# Altium PCB PCB1.PcbDoc
Units mm, origin at the board's own origin, x right, y up, seen from the top; angles counter-clockwise.
Board outline 90 x 85 mm, 2 copper layers (Top Layer, Bottom Layer); 35 components, 43 nets, 187 pads, 34 vias.
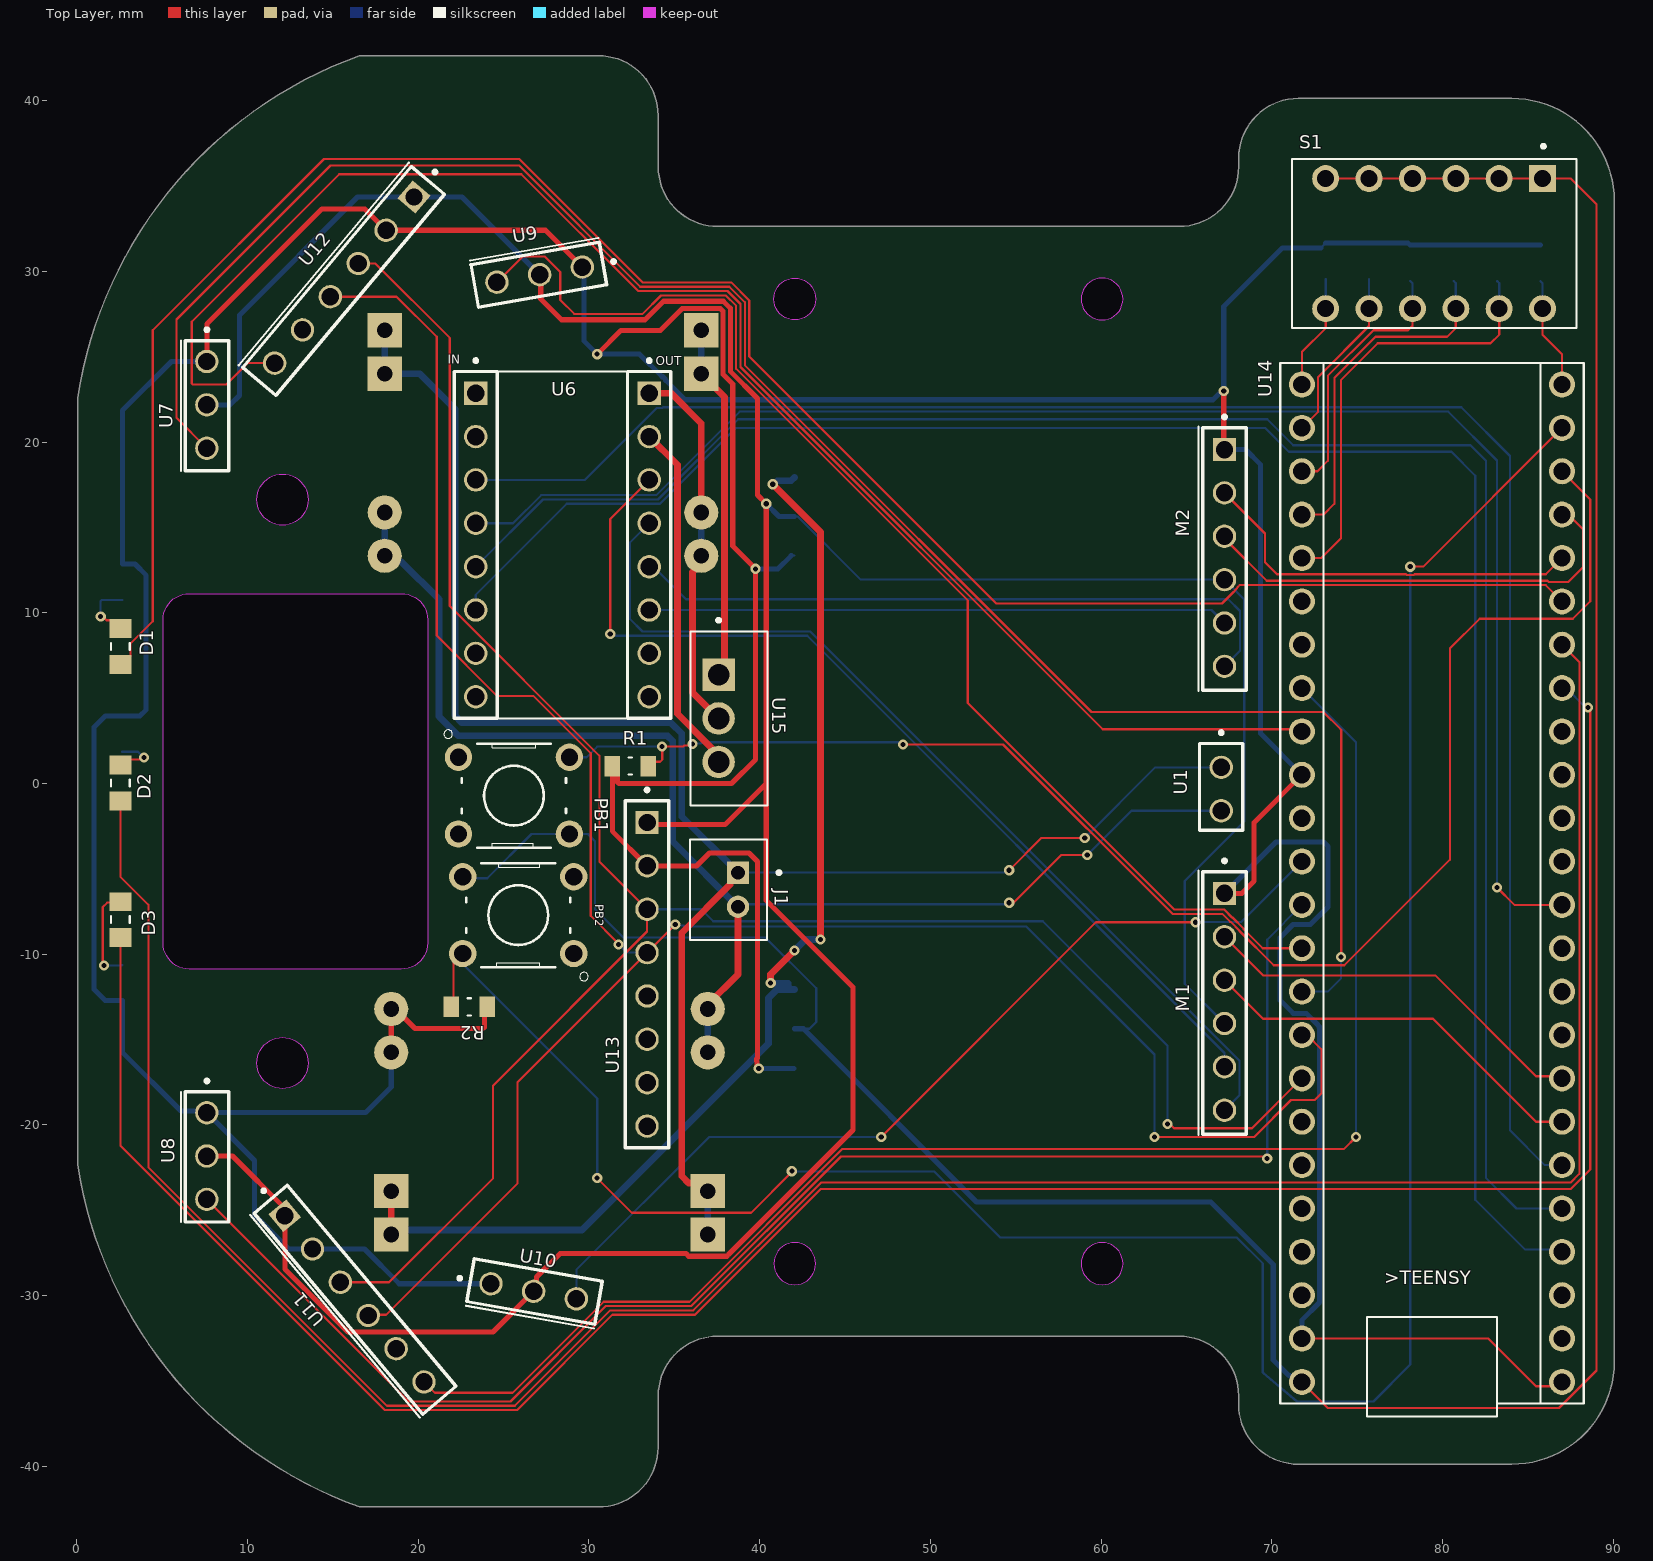
[diagram p0: Top Layer view]
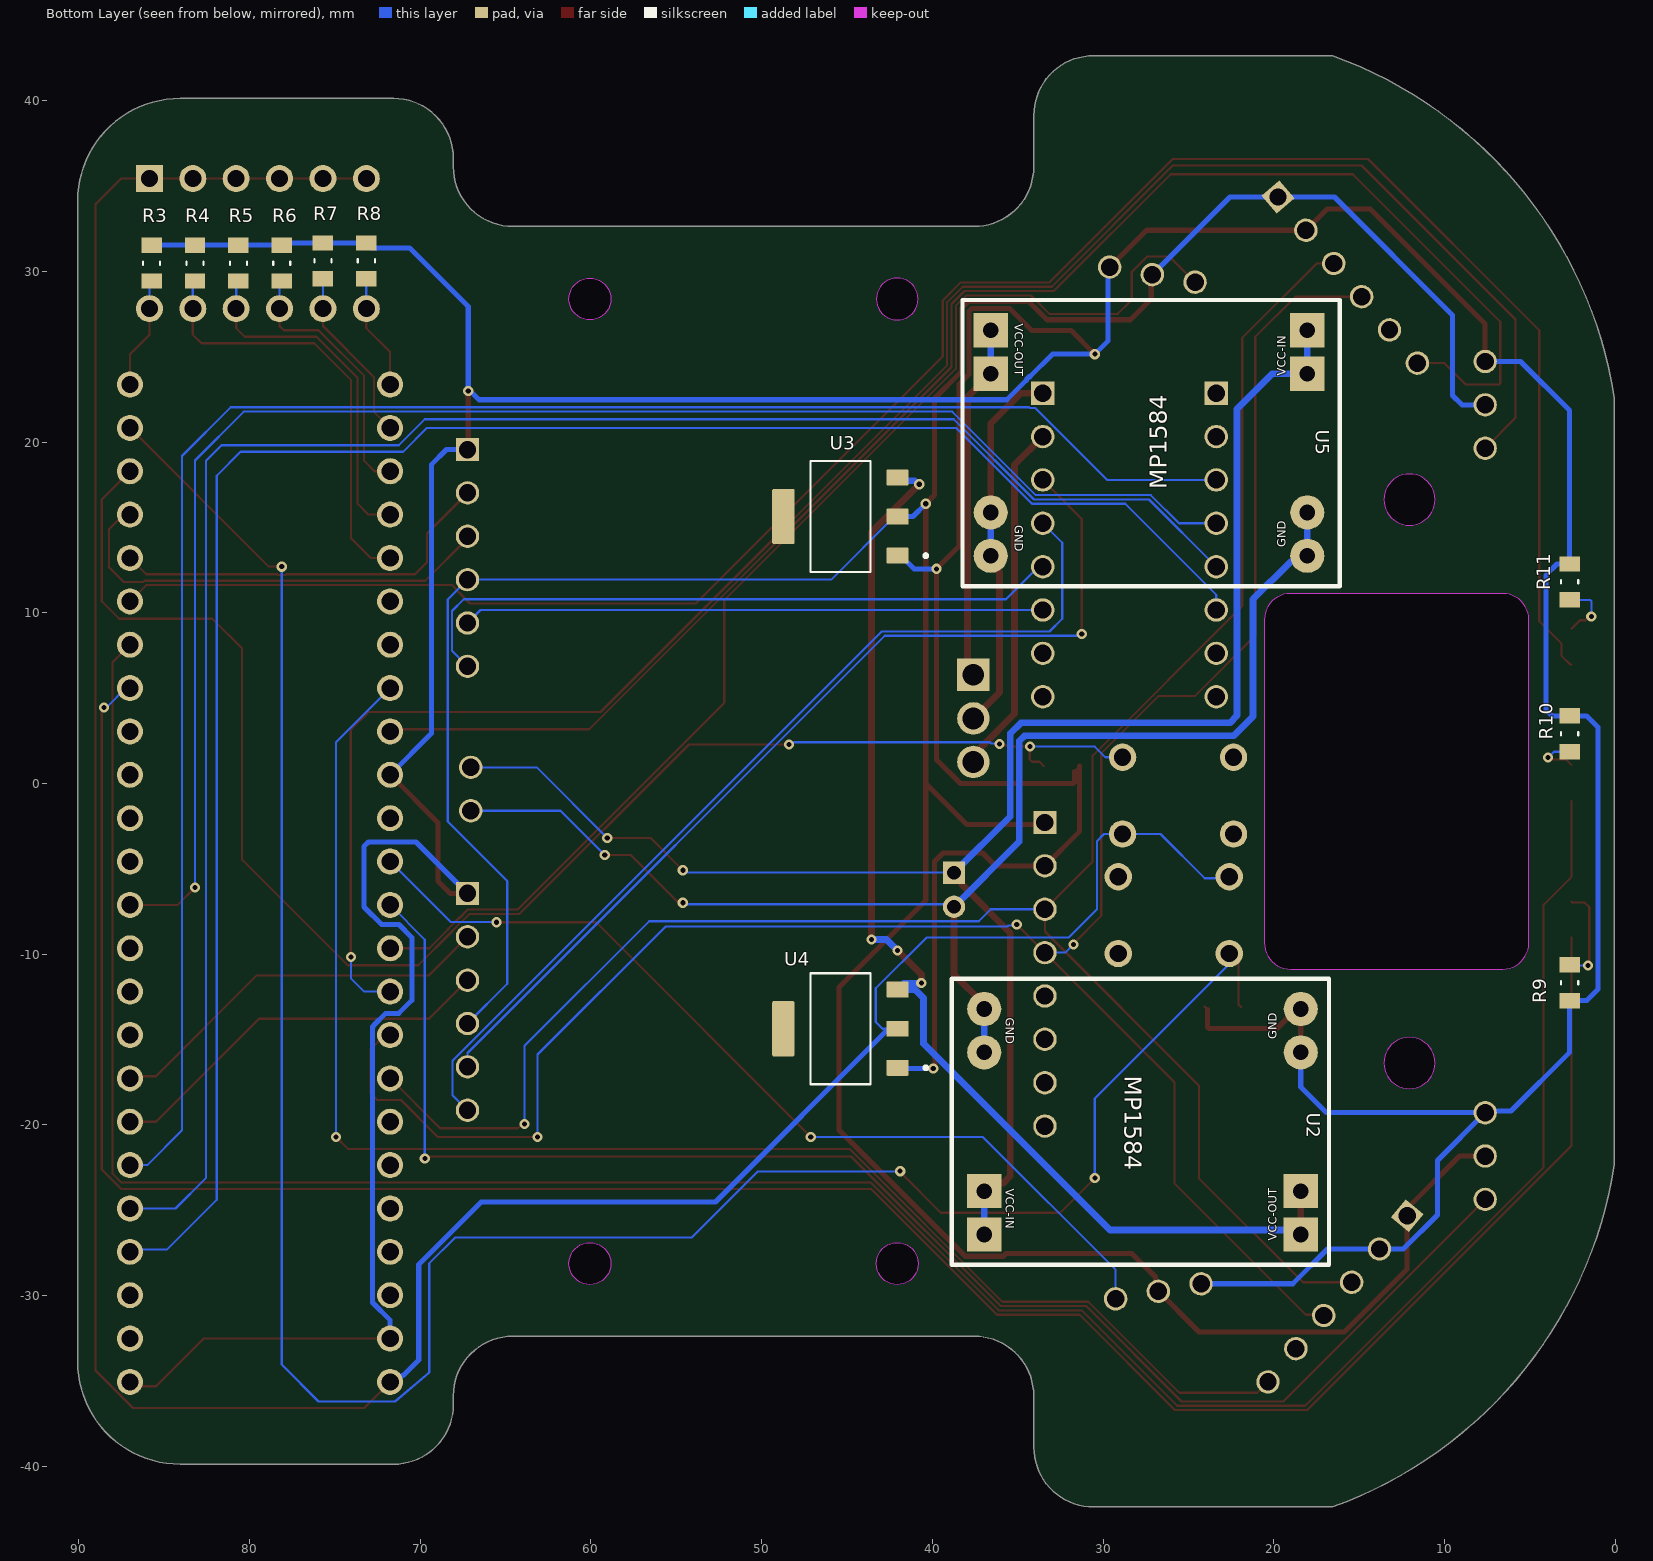
[diagram p1: Bottom Layer view, seen from below]
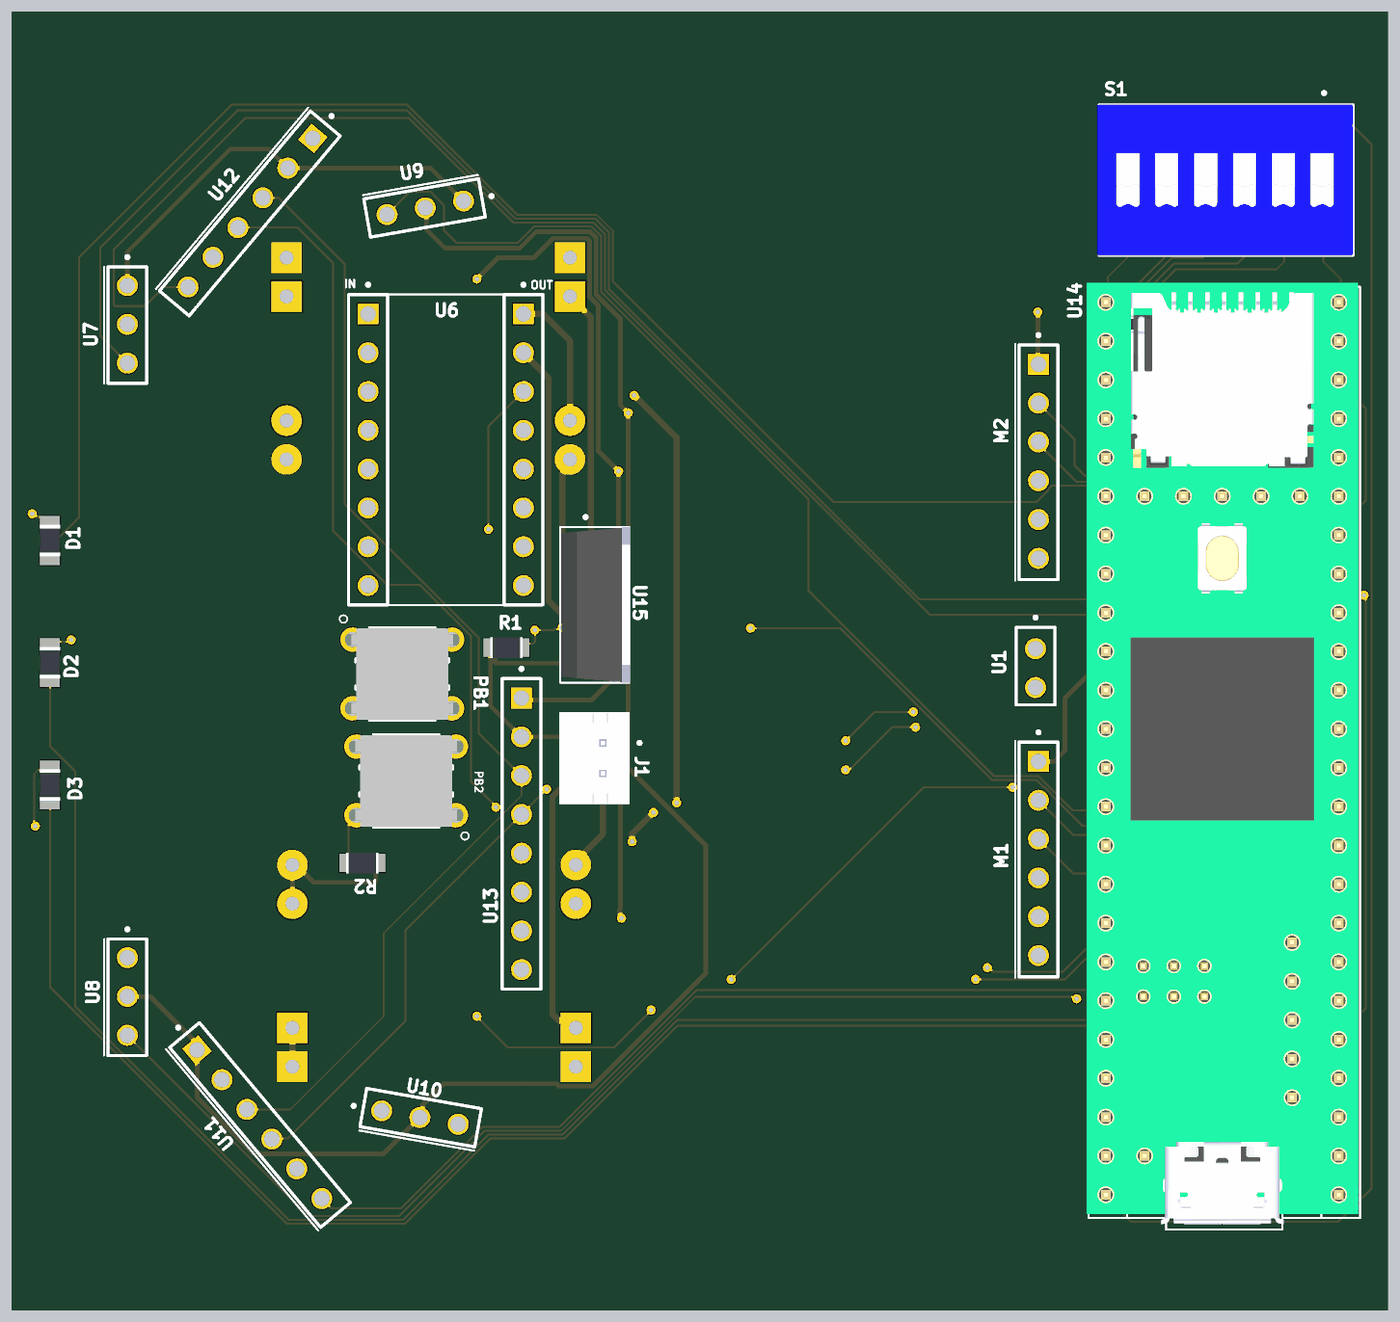
[diagram p2: 3D render of the assembled board from above, using the file's embedded part models]
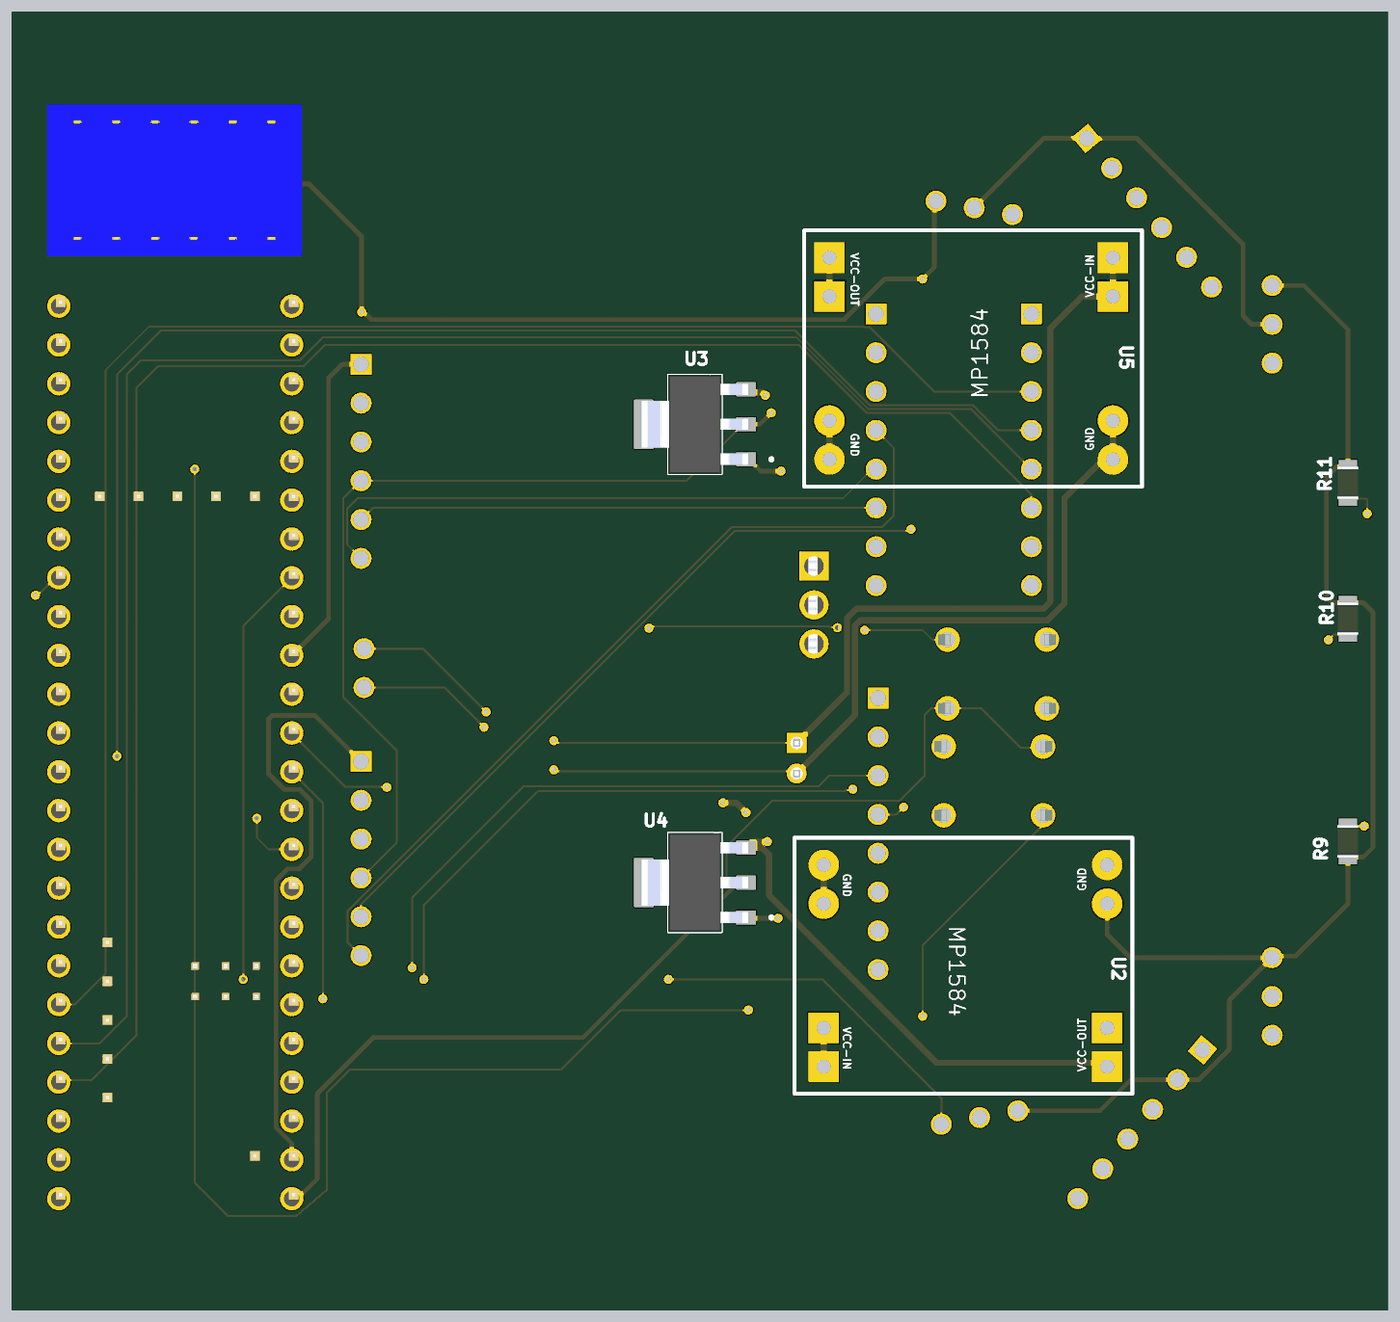
[diagram p3: 3D render of the assembled board from below, using the file's embedded part models]

## Layer stack, top to bottom
Top Solder: solder mask 0.0102, Solder Resist, Dk 3.5
Top Layer: signal copper 0.0356
Dielectric 1: dielectric 0.32, FR-4, Dk 4.8
Bottom Layer: signal copper 0.0356
Bottom Solder: solder mask 0.0102, Solder Resist, Dk 3.5

## Board outline
0.054,-22.323 ccw(c25.165,-18.472) 16.554,-42.373 30.554,-42.373 ccw(c30.554,-38.873) 34.054,-38.873 34.054,-35.873 cw(c37.554,-35.873) 37.554,-32.373 64.554,-32.373 cw(c64.554,-35.873) 68.054,-35.873 68.054,-36.373 ccw(c71.554,-36.373) 71.554,-39.873 84.054,-39.873 ccw(c84.054,-33.873) 90.054,-33.873 90.054,34.127 ccw(c84.054,34.127) 84.054,40.127 71.554,40.127 ccw(c71.554,36.627) 68.054,36.627 68.054,36.127 cw(c64.554,36.127) 64.554,32.627 37.554,32.627 cw(c37.554,36.127) 34.054,36.127 34.054,39.127 ccw(c30.554,39.127) 30.554,42.627 16.554,42.627 ccw(c25.165,18.726) 0.054,22.577
cut-out: 58.829,28.377 ccw(c60.054,28.377) 60.054,27.152 ccw(c60.054,28.377) 61.279,28.377 ccw(c60.054,28.377) 60.054,29.602 ccw(c60.054,28.377)
cut-out: 42.054,27.152 cw(c42.054,28.377) 40.829,28.377 cw(c42.054,28.377) 42.054,29.602 cw(c42.054,28.377) 43.279,28.377 cw(c42.054,28.377)
cut-out: 58.829,-28.123 ccw(c60.054,-28.123) 60.054,-29.348 ccw(c60.054,-28.123) 61.279,-28.123 ccw(c60.054,-28.123) 60.054,-26.898 ccw(c60.054,-28.123)
cut-out: 40.829,-28.123 ccw(c42.054,-28.123) 42.054,-29.348 ccw(c42.054,-28.123) 43.279,-28.123 ccw(c42.054,-28.123) 42.054,-26.898 ccw(c42.054,-28.123)
cut-out: 10.554,16.627 cw(c12.054,16.627) 12.054,18.127 cw(c12.054,16.627) 13.554,16.627 cw(c12.054,16.627) 12.054,15.127 cw(c12.054,16.627)
cut-out: 6.597,-10.873 cw(c6.597,-9.33) 5.054,-9.33 5.054,9.584 cw(c6.597,9.584) 6.597,11.127 19.011,11.127 cw(c19.011,9.584) 20.554,9.584 20.554,-9.33 cw(c19.011,-9.33) 19.011,-10.873
cut-out: 10.554,-16.373 cw(c12.054,-16.373) 12.054,-14.873 cw(c12.054,-16.373) 13.554,-16.373 cw(c12.054,-16.373) 12.054,-17.873 cw(c12.054,-16.373)

## Design rules (kind name [scope] priority, off if disabled: settings)
BoardOutlineClearance [All] p1: gap=0.2 ignorepadtopadclearanceinfootprint=FALSE
Clearance [All] p1: gap=0.127 ignorepadtopadclearanceinfootprint=FALSE except(0.25: Arc-Hole Track-Hole SMDPad-Hole THPad-Hole Via-Hole Fill-Hole Poly-Hole Region-Hole Text-Hole)
ComponentClearance [All] p1: gap=0.127 collisioncheckmode=3 verticalgap=0.127 showdistances=TRUE
DiffPairsRouting [All] p1: maxlimit=0.254 minlimit=0.127 mostfreqgap=0.127 toplayer_minwidth=0.127 toplayer_maxwidth=25.4 toplayer_prefwidth=0.127 bottomlayer_minwidth=0.127 bottomlayer_maxwidth=25.4 bottomlayer_prefwidth=0.127 maxuncoupledlength=12.7
Height [All] p1: minheight=0 maxheight=1816.048 prefheight=12.7
HoleSize [All] p1: absolutevalues=TRUE maxlimit=6.3 minlimit=0.3 maxpercent=80.000 minpercent=20.000
HoleToHoleClearance [All] p1: gap=0.25 allowstackedmicrovias=FALSE
MinimumAnnularRing [All] p1: minimumring=0.076
MinimumSolderMaskSliver [All] p1: minsoldermaskwidth=0
PlaneClearance [All] p1: clearance=0.127
PlaneConnect PlaneConnectPowerPads [InPadClass('PowerPads')] p1: planeconnectstyle=Direct reliefexpansion=0.508 reliefentries=4 reliefconductorwidth=0.254 reliefairgap=0.254
PlaneConnect [All] p2: pad.planeconnectstyle=Relief pad.reliefexpansion=0.3 pad.reliefentries=4 pad.reliefconductorwidth=0.127 pad.reliefairgap=0.127 via.planeconnectstyle=Direct via.reliefexpansion=0.3 via.reliefentries=4 via.reliefconductorwidth=0.127 via.reliefairgap=0.127
PolygonConnect PolygonConnectPowerPads [All vs (InPadClass('PowerPads'))] p1: connectstyle=Direct reliefconductorwidth=0.254 reliefentries=4 polygonreliefangle="90 Angle" airgapwidth=0.254
PolygonConnect [All] p2: thpad.connectstyle=Relief thpad.reliefconductorwidth=0.127 thpad.reliefentries=4 thpad.polygonreliefangle="90 Angle" thpad.airgapwidth=0.127 smdpad.connectstyle=Relief smdpad.reliefconductorwidth=0.127 smdpad.reliefentries=4 smdpad.polygonreliefangle="90 Angle" smdpad.airgapwidth=0.127 via.connectstyle=Direct via.reliefconductorwidth=0.127 via.reliefentries=4 via.polygonreliefangle="90 Angle" via.airgapwidth=0.127
RoutingVias [All] p1: holewidth=0.3 width=0.6 viastyle="Through Hole" minholewidth=0.3 minwidth=0.6 maxholewidth=0.6 maxwidth=6.6
SilkToSilkClearance [All] p1: silktosilkclearance=0
SilkToSolderMaskClearance [IsPad] p1: minsilkscreentomaskgap=0.127 clearancetoexposedcopper=TRUE
SolderMaskExpansion [All] p1: expansion=0.075 istentingtop=FALSE
SupplyNets "Schematic Supply Nets" [InNet('GND')] p1: voltage=0.000
Width [All] p1: maxlimit=25.4 minlimit=0.127 preferedwidth=0.127 minimp=50.000000 maximp=50.000000 favimp=50.000000
20 further rules are at their usual default settings.

## Components (designator, comment, footprint, x,y, rotation, side; value= is the part's Value field where it differs from the comment)
D1 "LED" 150080RS75000 2.4,8 r90 top
D2 "LED" 150080RS75000 2.4,0 r90 top
D3 "LED" 150080RS75000 2.4,-8 r90 top
J1 "Power_jack" Power_jack 38.227,-4.953 r90 top
M1 "Motor_socket" Motor_socket 66,-13 r0 top
M2 "Motor_socket" Motor_socket 66,13 r0 top
PB1 "Push_button" Push_button 25.527,-0.762 r0 top
PB2 "Push_button" Push_button 25.932,-7.66 r180 top
R1 "RC0805JR-0710KL" RC0805JR-0710KL 32.419,1.016 r0 top value=10kR
R2 "RC0805JR-0710KL" RC0805JR-0710KL 22.987,-13.081 r180 top value=10kR
R3 "RC0805JR-0710KL" RC0805JR-0710KL 85.725,30.48 r270 bottom value=10kR
R4 "RC0805JR-0710KL" RC0805JR-0710KL 83.185,30.48 r270 bottom value=10kR
R5 "RC0805JR-0710KL" RC0805JR-0710KL 80.645,30.48 r270 bottom value=10kR
R6 "RC0805JR-0710KL" RC0805JR-0710KL 78.105,30.48 r270 bottom value=10kR
R7 "RC0805JR-0710KL" RC0805JR-0710KL 75.692,30.607 r270 bottom value=10kR
R8 "RC0805JR-0710KL" RC0805JR-0710KL 73.152,30.607 r270 bottom value=10kR
R9 "RC0805FR-071K5L" RC0805FR-071K5L 2.794,-11.557 r90 bottom value=1.5kR
R10 "RC0805FR-071K5L" RC0805FR-071K5L 2.54,2.794 r270 bottom value=1.5kR
R11 "RC0805FR-071K5L" RC0805FR-071K5L 2.54,11.684 r270 bottom value=1.5kR
S1 "DIP_switch" DIP_switch 79.502,32.766 r180 top
U1 "Voltage_display" Voltage_display 66.5,0 r90 top
U2 "MP1584" MP1584 25.527,-19.304 r270 bottom
U3 "AMS1117-3.3" AMS1117-3.3 45,15 r0 bottom
U4 "AMS1117-3.3" AMS1117-3.3 45,-15 r0 bottom
U5 "MP1584" MP1584 29.464,19.431 r90 bottom
U6 "drv8833" drv8833 15.748,14.3 r0 top
U7 "PWM_tof" P_tof 8,22 r0 top
U8 "PWM_tof" P_tof 8,-22 r0 top
U9 "PWM_tof" P_tof 27,29.4 r280 top
U10 "PWM_tof" P_tof 27,-29.4 r80 top
U11 "VL53L01" VL530L01 11,-34 r40 top
U12 "VL53L01" VL530L01 11,34 r320 top
U13 "MPU6050" MPU6050 32.385,-11.608 r90 top
U14 "teensy4.1" teensy4.1 78.359,-1.016 r0 top
U15 "L7806CV" L7806CV 37.973,4.318 r270 top

## Footprints (in the part's own frame and the unit in brackets; to place one, negate y for a bottom-side part, rotate by r counter-clockwise, add the part's x,y. Pads: shape width x height; smd on the part's side, far side on the other; paste and mask are expansions set on the pad)
150080RS75000 [mm]
  rect 1.1x1.3 smd: 1(-1.025,-0.152) 2(1.075,-0.152)
  silkscreen extent -0.17,-0.7 0.23,0.4, body extent -1.02,-0.83 1.08,0.52, height 0.8
AMS1117-3.3 [mm]
  rrect15% 1.31x0.93 smd: 1(-2.964,1.655) 2(-2.964,-0.635) 3(-2.964,-2.925)
  rrect15% 1.31x3.24 smd: 4(3.726,-0.635)
  silkscreen extent -4.72,-3.89 2.13,2.62, body extent -3.12,-3.89 3.88,2.62, height 1.8
DIP_switch [mm]
  rect 1.58x1.58 / inner round 1.58 / far side rect 1.58x1.58 hole 1: 1A(-6.35,-2.667)
  round 1.58 hole 1: 1B(-6.35,4.953) 2A(-3.81,-2.667) 2B(-3.81,4.953) 3A(-1.27,-2.667) 3B(-1.27,4.953) 4A(1.27,-2.667) 4B(1.27,4.953) 5A(3.81,-2.667) 5B(3.81,4.953) 6A(6.35,-2.667) 6B(6.35,4.953)
  silkscreen extent -8.33,-4.66 8.33,6.09, body extent -8.26,-3.81 8.4,6.09, height 5.18
drv8833 [mm]
  round 1.37 hole 1.02: AIN1(7.62,-4.14) AIN2(7.62,-1.6) AISEN(17.78,-6.68) AOUT1(17.78,-4.14) AOUT2(17.78,-1.6) BIN1(7.62,3.48) BIN2(7.62,0.94) BISEN(17.78,-9.22) BOUT1(17.78,3.48) BOUT2(17.78,0.94) nFAULT(7.62,-9.22) nSLEEP(7.62,-6.68) VIN(17.78,6.02) VMM(7.62,6.02)
  rect 1.37x1.37 / inner round 1.37 / far side rect 1.37x1.37 hole 1.02: GND_in(7.62,8.56) GND_out(17.78,8.56)
  silkscreen extent 6.35,-10.49 19.05,10.57
L7806CV [mil]
  rect 75x75 / inner round 75 / far side rect 75x75 hole 50: 1(-80.39,-15)
  round 75 hole 50: 2(20,-15) 3(120.39,-15)
  silkscreen extent -210,-80 221,97, body extent -181,-77 221,100, height 775
Motor_socket [mm]
  round 1.37 hole 1.02: A(1.222,1.479) B(1.222,4.019) M1(1.222,-6.141) M2(1.222,-3.601) VCC(1.222,-1.061)
  rect 1.37x1.37 / inner round 1.37 / far side rect 1.37x1.37 hole 1.02: GND(1.222,6.559)
  silkscreen extent -0.3,-7.59 2.49,8.57
MP1584 [mil]
  round 78.74 hole 36 paste-99999 mask+2: GNDin(-240,-450) GNDout(-240,280)
  round 78.74 hole 36 paste-99999 mask+4: GNDin(-140,-450) GNDout(-140,280)
  rect 78.74x78.74 hole 36 paste-99999 mask+4: Vin(180,-450) Vout(180,280)
  rect 78.74x78.74 hole 36 paste-99999 mask+2: Vin(280,-450) Vout(280,280)
  silkscreen extent -310,-525 350,345
MPU6050 [mm]
  rect 1.37x1.37 / inner round 1.37 / far side rect 1.37x1.37 hole 1.02: 01(9.322,-1.016)
  round 1.37 hole 1.02: 02(6.782,-1.016) 03(4.242,-1.016) 04(1.702,-1.016) 05(-0.838,-1.016) 06(-3.378,-1.016) 07(-5.918,-1.016) 08(-8.458,-1.016)
  silkscreen extent -9.73,-2.29 11.33,0.25
P_tof [mm]
  round 1.37 hole 1.02: 01(-0.381,2.718) 02(-0.381,0.178) 03(-0.381,-2.362)
  silkscreen extent -1.91,-3.68 0.89,4.68
Power_jack [mm]
  rect 1.308x1.308 / inner round 1.308 / far side rect 1.308x1.308 hole 0.8: 1(-0.27,-0.499)
  round 1.308 hole 0.8: 2(-2.27,-0.499)
  silkscreen extent -4.22,-3 1.68,2.3, body extent -4.22,-2.2 1.68,2.3, height 6
Push_button [mm]
  round 1.6 hole 1: 1(-3.174,2.301) 2(3.326,2.301) 3(-3.174,-2.199) 4(3.326,-2.199)
  silkscreen extent -4.02,-3 3.12,3.9, body extent -3.77,-2.95 3.93,3.05, height 4.3
RC0805FR-071K5L [mm]
  rect 0.9x1.2 smd: 1(-1.169,-0.127) 2(0.931,-0.127)
  silkscreen extent -0.22,-0.63 -0.02,0.37, body extent -1.17,-0.8 0.93,0.55, height 0.6
RC0805JR-0710KL [mm]
  rect 0.9x1.2 smd: 1(-1.05,0) 2(1.05,0)
  silkscreen extent -0.1,-0.5 0.1,0.5, body extent -1.05,-0.67 1.05,0.67, height 0.6
teensy4.1 [mil]
  round 60 hole 40: 3V3(-260,-1140) 3V3@2(340,60) AGND/GND(-260,-1240) D0(340,-1240) D1(340,-1140) D2(340,-1040) D3(340,-940) D4(340,-840) D5(340,-740) D6(340,-640) D7(340,-540) D8(340,-440) D9(340,-340) D10(340,-240) D11(340,-140) D12(340,-40) D13(-260,-40) D14(-260,-140) D15(-260,-240) D16(-260,-340) D17(-260,-440) D18(-260,-540) D19(-260,-640) D20(-260,-740) D21(-260,-840) D22(-260,-940) D23(-260,-1040) D24(340,160) D25(340,260) D26(340,360) D27(340,460) D28(340,560) D29(340,660) D30(340,760) D31(340,860) D32(340,960) D33(-260,960) D34(-260,860) D35(-260,760) D36(-260,660) D37(-260,560) D38(-260,460) D39(-260,360) D40(-260,260) D41(-260,160) GND(340,-1340) GND@2(-260,60) VIN(-260,-1340)
  silkscreen extent -310,-1420 390,1010, body extent -315,-1408 385,1020, height 282
VL530L01 [mm]
  rect 1.37x1.37 / inner round 1.37 / far side rect 1.37x1.37 hole 1.02: 01(6.477,5.893)
  round 1.37 hole 1.02: 02(6.477,3.353) 03(6.477,0.813) 04(6.477,-1.727) 05(6.477,-4.267) 06(6.477,-6.807)
  silkscreen extent 4.95,-8.26 7.75,7.9
Voltage_display [mm]
  round 1.37 hole 1.02: GND(-1.596,-0.53) IN(0.944,-0.53)
  silkscreen extent -2.74,-1.8 3.08,0.74

## Part data
D1 D2 D3: library part 150080RS75000, "Single Color LED, Red, Water Clear, 1.4mm", Color=Red, Forward Current=30mA, Manufacturer="Wurth Electronics", Max Operating Temperature=85°C, Min Operating Temperature=-40°C, Supplier Part Number=732-4984-1-ND, Category=LEDs, Channels=1, ComponentLink1Description=https://datasheet.ciiva.com:443/pdfs/VipMasterIC/IC/MIDC/MIDC-S-A0007455974/MIDC-S-A0007455974-1.pdf?src-supplier=IHS+Markit, ComponentLink1URL=https://datasheet.ciiva.com:443/pdfs/VipMasterIC/IC/MIDC/MIDC-S-A0007455974/MIDC-S-A0007455974-1.pdf?src-supplier=IHS+Markit, ComponentLink2Description=https://datasheet.ciiva.com/22656/150080rs75000-22656961.pdf?src-supplier=Element14, ComponentLink2URL=https://datasheet.ciiva.com/22656/150080rs75000-22656961.pdf?src-supplier=Element14, ComponentLink3Description=https://datasheet.ciiva.com/29279/759435-da-01-en-chipled-0805-w-kl-rot-150080rs75000-29279032.pdf?src-supplier=Conrad, ComponentLink3URL=https://datasheet.ciiva.com/29279/759435-da-01-en-chipled-0805-w-kl-rot-150080rs75000-29279032.pdf?src-supplier=Conrad, Lens Style="WATER CLEAR", Luminous Intensity-Nom=150mcd, Manufacturer Part Number=150080RS75000, Mounting Technology="Surface Mount", Optoelectronic Device Type="SINGLE COLOR LED", Overall Height=0.7mm, Packaging="Tape and Reel", Pins=2, Pricing="1=0.19, 50=0.176, 100=0.151, 500=0.14688 (USD)", Reach SVHC Compliant=Yes, RoHS=Yes, RoHS Compliant=Yes, Shape=Rectangular, Size=1.4mm, Stock=56216, Supplier=Digikey, Terminal Pitch=2.1mm, Viewing Angle=140°
R1 R2 R3 R4 R5 R6 R7 R8: "Fixed Resistor, Metal Glaze/thick Film, 0.125W, 10000ohm, 150V, 5% +/-Tol, 100ppm/Cel, Surface Mount, 0805", Case/Package=0805, Manufacturer=Yageo, Max Operating Temperature=155°C, Min Operating Temperature=-55°C, Package Height=0.5mm, Package Length=2mm, Package Shape=Rectangular, Package Width=1.25mm, Power=125mW, Rated Temperature=70°C, Resistor Type="FIXED RESISTOR", Supplier Part Number=80K7383, Temperature Coefficient (ppm/Cel)=100, Tolerance=5%, Working Voltage=150V, Additional Feature="LASER TRIMMABLE", Category="Chip SMD Resistors", ComponentLink1Description=https://datasheet.ciiva.com:443/pdfs/VipMasterIC/IC/YAGO/YAGO-S-A0008145938/YAGO-S-A0008145938-1.pdf?src-supplier=IHS+Markit, ComponentLink1URL=https://datasheet.ciiva.com:443/pdfs/VipMasterIC/IC/YAGO/YAGO-S-A0008145938/YAGO-S-A0008145938-1.pdf?src-supplier=IHS+Markit, ComponentLink2Description=https://datasheet.ciiva.com/7983/444164-7983765.pdf?src-supplier=Element14, ComponentLink2URL=https://datasheet.ciiva.com/7983/444164-7983765.pdf?src-supplier=Element14, ComponentLink3Description=https://datasheet.ciiva.com/7941/444164-7941870.pdf?src-supplier=Element14, ComponentLink3URL=https://datasheet.ciiva.com/7941/444164-7941870.pdf?src-supplier=Element14, ComponentLink4Description=https://datasheet.ciiva.com/7941/444164-7941871.pdf?src-supplier=Element14, ComponentLink4URL=https://datasheet.ciiva.com/7941/444164-7941871.pdf?src-supplier=Element14, Construction=Chip, JESD-609 Code=e3, Manufacturer Part Number=RC0805JR-0710KL, Mounting Technology="Surface Mount", Packaging="Tape and Reel", Pins=2, Pricing="1=0.014, 30=0.011, 50=0.01, 100=0.008 (USD)", Reach SVHC Compliant=Yes, RoHS=Yes, RoHS Compliant=Yes, Stock=270, Supplier=Avnet, Technology="METAL GLAZE/THICK FILM", Terminal Finish=Nickel, Termination=Wraparound
R9 R10 R11: "Fixed Resistor, Metal Glaze/thick Film, 0.125W, 1500ohm, 150V, 1% +/-Tol, 100ppm/Cel, Surface Mount, 0805", Case/Package=0805, Manufacturer=Yageo, Max Operating Temperature=155°C, Min Operating Temperature=-55°C, Package Height=0.5mm, Package Length=2mm, Package Shape=Rectangular, Package Width=1.25mm, Power=125mW, Rated Temperature=70°C, Resistor Type="FIXED RESISTOR", Supplier Part Number=311-1.50KCRCT-ND, Temperature Coefficient (ppm/Cel)=100, Tolerance=1%, Working Voltage=150V, Additional Feature="LASER TRIMMABLE", Category="Chip SMD Resistors", ComponentLink1Description=https://datasheet.ciiva.com:443/pdfs/VipMasterIC/IC/YAGO/YAGO-S-A0008145938/YAGO-S-A0008145938-1.pdf?src-supplier=IHS+Markit, ComponentLink1URL=https://datasheet.ciiva.com:443/pdfs/VipMasterIC/IC/YAGO/YAGO-S-A0008145938/YAGO-S-A0008145938-1.pdf?src-supplier=IHS+Markit, ComponentLink2Description=https://datasheet.ciiva.com/17423/rc0805-17423247.pdf?src-supplier=Future+Electronics, ComponentLink2URL=https://datasheet.ciiva.com/17423/rc0805-17423247.pdf?src-supplier=Future+Electronics, Construction=Chip, JESD-609 Code=e3, Manufacturer Part Number=RC0805FR-071K5L, Mounting Technology="Surface Mount", Packaging="Tape and Reel", Pins=2, Pricing="1=0.1, 10=0.012, 100=0.0112, 1000=0.00918, 2500=0.00686 (USD)", Reach SVHC Compliant=Yes, RoHS=Yes, RoHS Compliant=Yes, Stock=226709, Supplier=Digikey, Technology="METAL GLAZE/THICK FILM", Terminal Finish=Nickel, Termination=Wraparound
U7 U8 U9 U10: library part P_tof

## Via types
v1: diameter 0.6, hole 0.3, Top Layer to Bottom Layer, 34 vias

## Nets (pads, with @x,y where several pads share a name; then routed paths per layer and width w, separated by ;. In a path a pad name is that pad's centre, name@x,y a point inside that pad or via, vN(x,y) a via of type N, cw(c..) or ccw(c..) an arc to the next point about the centre after c; other vN are vias at no path point)
+3.3: PB1.4 PB2.4 S1.1A S1.2A S1.3A S1.4A S1.5A S1.6A U4.2 U14.VIN | length 176.7
  Top Layer w0.127: U14.VIN 73.279,-36.576 86.818,-36.576 89.009,-34.385 89.009,33.927 87.503,35.433 S1.1A S1.2A S1.3A S1.4A S1.5A S1.6A
  Bottom Layer w0.127: PB2.4@22.074,-5.548 24.043,-5.548 26.63,-2.961 28.726,-2.961 29.938,-2.961 30.353,-3.376 30.353,-7.366 32.004,-9.017 40.327,-9.017 43.307,-11.997 43.307,-13.97 42.912,-14.365 42.559,-14.365 U4.2@42.226,-14.365
  Bottom Layer w0.3: U4.2 42.226,-14.365 42.559,-14.365 52.705,-24.511 66.421,-24.511 70.082,-28.172 70.082,-33.76 71.007,-34.685 71.057,-34.685 71.424,-35.052 U14.VIN
+3.3-tof: M1.VCC M2.VCC U3.2 U7.02 U8.02 U9.02 U10.02 U11.01 U12.01 U13.01 | length 208.9
  Top Layer w0.127: U13.01 U13.01@33.528,-2.413
  Top Layer w0.3: U8.02 9.122,-21.822 12.174,-24.874 U11.01 ; U11.01@12.192,-25.304 12.192,-26.304 12.192,-28.448 15.875,-32.131 24.372,-32.131 26.933,-29.57 26.933,-28.913 28.316,-27.531 35.68,-27.531 35.842,-27.693 38.072,-27.693 38.234,-27.531 45.466,-20.299 45.466,-11.938 40.386,-6.858 40.386,0 ; U9.02@27.178,29.591 27.178,28.381 28.394,27.165 33.282,27.165 34.364,28.247 37.868,28.247 38.28,27.835 38.28,24.147 39.878,22.549 39.878,16.891 v1(40.386,16.383) 40.386,0 ; U13.01@33.528,-2.413 37.973,-2.413 40.386,0
  Bottom Layer w0.127: 20.749,34.351 20.767,34.351 ; U3.2 42.226,15.635 45.922,11.939 M2.VCC 68.384,10.778 68.384,-2.228 64.897,-5.715 64.897,-11.735 M1.VCC
  Bottom Layer w0.3: U7.02 8.97,22.178 9.525,22.733 9.525,27.432 16.444,34.351 U12.01 20.749,34.351 ; 20.767,34.351 22.564,34.351 U9.02 ; v1(40.386,16.383) 41.134,15.635 U3.2
+6: U6.VIN U15.3 | length 20.7
  Top Layer w0.4: U6.VIN 35.179,18.669 35.179,4.084 37.1,2.163 37.1,2.159 37.592,1.667 U15.3
A1: M2.M2 U6.AOUT1 | length 34
  Bottom Layer w0.127: U6.AOUT1 66.462,10.16 M2.M2
A1_in: U6.AIN1 U14.D2 | length 113.4
  Bottom Layer w0.127: U6.AIN1 23.368,11.049 28.702,16.383 34.163,16.383 38.608,20.828 69.596,20.828 70.993,19.431 80.518,19.431 81.915,18.034 81.915,-24.384 84.836,-27.305 86.868,-27.305 U14.D2
A2: M2.M1 U6.AOUT2 | length 39.3
  Bottom Layer w0.127: U6.AOUT2 33.782,12.7 35.687,10.795 67.437,10.795 68.13,10.102 68.13,7.767 M2.M1
A2_in: U6.AIN2 U14.D3 | length 111
  Bottom Layer w0.127: U6.AIN2 27.305,16.637 34.046,16.637 38.745,21.336 69.723,21.336 71.247,19.812 81.628,19.812 82.55,18.89 82.55,-23.114 84.328,-24.892 U14.D3
B1: M1.M2 U6.BOUT1 | length 56.9
  Top Layer w0.127: v1(31.242,8.763) 31.242,15.494 U6.BOUT1
  Bottom Layer w0.127: v1(31.242,8.763) 31.333,8.672 31.531,8.672 31.553,8.651 42.784,8.651 67.222,-15.787 M1.M2
B1_in: U6.BIN2 U14.D10 | length 93
  Top Layer w0.127: v1(83.185,-6.096) 84.201,-7.112 U14.D10
  Bottom Layer w0.127: U6.BIN2 25.549,15.24 27.2,16.891 33.941,16.891 38.83,21.78 80.328,21.78 83.185,18.923 v1(83.185,-6.096)
B2: M1.M1 U6.BOUT2 | length 55.8
  Bottom Layer w0.127: U6.BOUT2 32.385,14.097 32.385,9.652 33.132,8.905 42.955,8.905 68.098,-16.238 68.098,-18.265 M1.M1
B2_in: U6.BIN1 U14.D4 | length 106.9
  Bottom Layer w0.127: U6.BIN1 29.75,17.78 33.954,21.985 34.292,21.985 34.342,22.034 81.09,22.034 83.947,19.177 83.947,-20.32 85.979,-22.352 U14.D4
FL: U8.03 U14.D15 | length 88.7
  Top Layer w0.127: U8.03 19.452,-36.195 25.4,-36.195 30.988,-30.607 35.998,-30.607 44.761,-21.844 69.596,-21.844 v1(69.723,-21.971)
  Bottom Layer w0.127: v1(69.723,-21.971) 69.723,-9.144 U14.D15
FR: U7.03 U14.D17 | length 113.3
  Top Layer w0.127: U7.03 5.842,21.415 5.842,27.178 14.859,36.195 25.908,36.195 33.008,29.095 38.219,29.095 39.128,28.186 39.128,24.499 59.436,4.191 73.013,4.191 74.028,3.176 74.065,3.139 74.065,3.086 74.065,-10.136 v1(74.041,-10.16)
  Bottom Layer w0.127: U14.D17 73.279,-12.192 74.041,-11.43 v1(74.041,-10.16)
GND: M1.GND M2.GND R1.1 R2.1 R3.1 R4.1 R5.1 R6.1 R7.1 R8.1 R9.1 R10.1 R11.1 U2.GNDout U3.1 U4.1 U7.01 U8.01 U9.01 U10.01 U11.02 U12.02 U13.02 U14.AGND/GND U14.GND U14.GND@2 | length 365
  Top Layer w0.127: U7.01 U7.01@7.62,24.719 ; 23.802,-14.351 23.876,-14.277 ; R2.1@23.876,-13.242 R2.1 ; R1.1 R1.1@31.676,0.709 ; v1@39.85,-16.609 v1(39.94,-16.699) ; M2.GND@67.183,19.599 M2.GND ; U14.AGND/GND 82.677,-32.512 85.471,-35.306 86.741,-35.306 U14.GND
  Top Layer w0.3: U7.01@7.62,24.719 7.62,26.924 14.351,33.655 16.867,33.655 U12.02 27.452,32.405 U9.01 ; U2.GNDout@18.415,-15.494 18.415,-13.208 18.415,-12.954 19.812,-14.351 23.802,-14.351 ; 23.876,-14.277 R2.1@23.876,-13.242 ; v1(30.48,25.146) 31.877,26.543 34.184,26.543 35.461,27.82 37.691,27.82 37.853,27.658 37.853,23.97 38.419,23.404 38.419,13.905 v1(39.751,12.573) 39.751,1.397 38.354,0 31.75,0 31.676,0.074 R1.1@31.676,0.709 ; R1.1 31.369,-2.794 U13.02 36.3,-4.826 37.062,-4.064 39.37,-4.064 39.878,-4.572 39.878,-16.072 39.805,-16.145 39.805,-16.249 39.85,-16.294 v1@39.85,-16.609 ; M2.GND@67.183,19.599 v1(67.183,22.987) ; M1.GND 68.235,-6.441 68.961,-5.715 68.961,-2.286 71.755,0.508
  Bottom Layer w0.127: R9.1@2.641,-12.7 R9.1 ; U8.01@7.514,-19.177 U8.01 ; U3.1@41.846,13.345 U3.1 ; U4.1@41.992,-16.699 U4.1 ; 66.881,22.813 67.055,22.987 v1(67.183,22.987) ; 72.697,-14.15 72.771,-14.224 ; R8.1@72.864,31.369 R8.1 ; R6.1@77.978,31.657 R6.1
  Bottom Layer w0.3: R9.1@2.641,-12.7 1.651,-12.7 1.016,-12.065 1.016,3.302 1.677,3.963 R10.1 3.709,3.963 4.064,4.318 4.064,12.192 3.403,12.853 R11.1 2.667,21.844 5.541,24.718 U7.01 ; R9.1 2.667,-15.748 6.096,-19.177 U8.01@7.514,-19.177 ; U2.GNDout@18.415,-15.494 18.415,-15.748 18.415,-17.78 16.913,-19.282 U8.01 10.414,-22.077 10.414,-25.273 12.409,-27.268 U11.02 16.854,-27.268 18.889,-29.303 23.857,-29.303 U10.01@24.257,-28.903 ; U9.01@29.718,30.247 29.718,25.908 v1(30.48,25.146) 32.965,25.146 34.289,23.822 34.328,23.822 34.49,23.66 34.49,23.621 35.632,22.479 66.547,22.479 66.881,22.813 ; v1(39.751,12.573) 41.074,12.573 U3.1@41.846,13.345 ; v1(39.94,-16.699) U4.1@41.992,-16.699 ; v1(67.183,22.987) 67.183,27.94 70.612,31.369 R8.1@72.864,31.369 ; M1.GND 70.234,-3.429 73.025,-3.429 73.279,-3.683 73.279,-7.239 72.252,-8.266 71.236,-8.266 70.485,-9.017 70.485,-12.7 71.247,-13.462 72.009,-13.462 72.697,-14.15 ; M2.GND 68.452,19.559 69.342,18.669 69.342,2.921 71.755,0.508 ; U14.AGND/GND 71.755,-31.441 72.794,-30.402 72.794,-14.302 72.771,-14.279 72.771,-14.224 ; R8.1 R7.1 R6.1@77.978,31.657 ; R6.1 R5.1 R4.1 R3.1
GND-6v: U5.GNDout U6.GND_out U15.2 | length 21.9
  Top Layer w0.4: U6.GND_out 34.798,22.86 36.576,21.082 U5.GNDout@36.576,15.875 ; U5.GNDout@36.576,13.335 36.576,12.902 36.068,12.394 36.068,5.334 U15.2
  Bottom Layer w0.4: U5.GNDout@36.576,13.335 U5.GNDout@36.576,15.875
LE_A: M1.A U14.D5 | length 23.2
  Top Layer w0.127: M1.A 69.481,-13.779 79.438,-13.779 85.471,-19.812 U14.D5
LE_B: M1.B U14.D6 | length 23.2
  Top Layer w0.127: M1.B 69.481,-11.239 79.566,-11.239 85.471,-17.145 86.868,-17.145 U14.D6
LS: U10.03 U14.D14 | length 54.1
  Top Layer w0.127: v1(47.117,-20.701) 59.69,-8.128 v1(65.532,-8.128)
  Bottom Layer w0.127: U10.03 29.26,-28.483 37.042,-20.701 v1(47.117,-20.701) ; v1(65.532,-8.128) 65.555,-8.105 68.222,-8.105 U14.D14
NetD1_1: D1.1 U14.D27 | length 120.7
  Top Layer w0.127: D1.1 2.652,6.975 3.139,7.462 3.139,8.192 4.445,9.499 4.445,26.543 14.478,36.576 25.908,36.576 33.135,29.349 38.324,29.349 39.382,28.291 39.382,25.007 53.848,10.541 66.089,10.541 67.081,10.541 67.754,11.213 68.038,11.546 68.112,11.62 86.042,11.62 U14.D27
NetD1_2: D1.2 R11.2 | length 3.6
  Top Layer w0.127: v1(1.397,9.779) 1.525,9.779 1.742,9.562 2.066,9.562 D1.2
  Bottom Layer w0.127: v1(1.397,9.779) 1.397,10.679 1.471,10.753 R11.2
NetD2_1: D2.1 U14.D26 | length 148.8
  Top Layer w0.127: D2.1 2.552,-5.455 4.191,-7.094 4.191,-22.479 18.161,-36.449 25.654,-36.449 31.242,-30.861 36.104,-30.861 43.597,-23.368 87.503,-23.368 88.011,-22.86 88.011,7.112 U14.D26
NetD2_2: D2.2 R10.2 | length 3
  Top Layer w0.127: D2.2 2.874,1.397 3.81,1.397 v1(3.937,1.524)
  Bottom Layer w0.127: R10.2 3.582,1.863 3.921,1.524 v1(3.937,1.524)
NetD3_1: D3.1 U14.D25 | length 139.6
  Top Layer w0.127: D3.1 2.552,-21.2 18.056,-36.703 25.781,-36.703 31.369,-31.115 36.209,-31.115 43.575,-23.749 87.503,-23.749 88.646,-22.606 88.646,4.318 v1(88.519,4.445)
  Bottom Layer w0.127: U14.D25 87.248,5.588 88.391,4.445 v1(88.519,4.445)
NetD3_2: D3.2 R9.2 | length 5.7
  Top Layer w0.127: v1(1.593,-10.668) 1.524,-10.599 1.524,-7.239 1.786,-6.977 2.5,-6.977 D3.2
  Bottom Layer w0.127: v1(1.593,-10.668) 2.625,-10.668 R9.2
NetJ1_1: J1.1 U1.IN U2.Vin U5.Vin | length 103
  Top Layer w0.127: U2.Vin@36.73,-23.395 U2.Vin@36.957,-23.622 ; J1.1@38.584,-5.365 J1.1 ; v1(54.61,-5.08) 56.497,-3.193 v1(59.037,-3.193)
  Top Layer w0.4: U2.Vin@36.73,-23.395 35.841,-23.395 35.433,-22.987 35.433,-8.763 38.272,-5.924 38.272,-5.677 J1.1@38.584,-5.365
  Bottom Layer w0.127: J1.1 54.467,-5.223 v1(54.61,-5.08) ; v1(59.037,-3.193) 63.174,0.944 U1.IN
  Bottom Layer w0.4: U5.Vin@18.034,26.543 18.034,24.003 20.066,24.003 22.143,21.926 22.143,3.982 22.57,3.556 34.798,3.556 35.433,2.921 35.433,-1.93 J1.1 ; U2.Vin@36.957,-26.162 U2.Vin@36.957,-23.622
NetJ1_2: J1.2 U1.GND U2.GNDin U5.GNDin | length 78.9
  Top Layer w0.127: v1(54.61,-6.985) 54.684,-7.059 54.79,-7.059 57.658,-4.191 v1(59.182,-4.191)
  Top Layer w0.4: U2.GNDin@36.957,-12.954 38.726,-11.185 J1.2
  Bottom Layer w0.127: U5.GNDin@18.034,13.335 18.392,12.977 19.027,12.977 ; J1.2 38.874,-7.076 54.519,-7.076 v1(54.61,-6.985) ; v1(59.182,-4.191) 61.777,-1.596 U1.GND
  Bottom Layer w0.4: U5.GNDin@18.034,13.335 U5.GNDin@18.034,15.875 ; 19.027,12.977 21.209,10.795 21.209,3.937 22.352,2.794 34.597,2.794 34.906,2.485 34.906,-3.403 J1.2 ; U2.GNDin@36.957,-15.494 U2.GNDin@36.957,-12.954
NetU2_Vout: U2.Vout U3.3 U4.3 | length 68.7
  Top Layer w0.4: U2.Vout@18.415,-26.162 U2.Vout@18.415,-23.622 ; v1(40.64,-11.684) 40.64,-11.176 v1(42.037,-9.779) ; v1(40.767,17.526) 43.561,14.732 v1(43.561,-9.144)
  Bottom Layer w0.127: v1(40.64,-11.684) v1@40.67,-11.714 ; v1(40.767,17.526) v1@40.858,17.617 ; U4.3@41.675,-11.714 U4.3
  Bottom Layer w0.4: U2.Vout@18.415,-26.162 29.591,-26.162 40.513,-15.24 40.513,-12.573 41.011,-12.075 U4.3 ; v1@40.67,-11.714 U4.3@41.675,-11.714 ; v1@40.832,17.591 40.859,17.564 41.027,17.732 41.843,17.732 U3.3 ; v1(42.037,-9.779) 42.672,-9.144 v1(43.561,-9.144)
NetU5_Vout: U5.Vout U15.1 | length 21.2
  Top Layer w0.127: U15.1 U15.1@37.729,6.223
  Top Layer w0.4: U5.Vout@36.576,24.003 37.942,22.637 37.942,6.436 U15.1@37.729,6.223
  Bottom Layer w0.4: U5.Vout@36.576,24.003 U5.Vout@36.576,26.543
PB1: PB1.2 R1.2 U14.D30 | length 91.8
  Top Layer w0.127: R1.2 33.723,1.27 34.163,1.27 34.29,1.397 34.29,2.148 v1(34.279,2.159) ; v1@34.29,2.159 35.506,2.159 35.573,2.226 35.969,2.226 v1(36.06,2.316) ; v1(48.387,2.286) 54.251,2.286 64.174,-7.638 67.095,-7.638 67.563,-8.105 67.585,-8.105 68.098,-8.618 68.098,-8.64 70.108,-10.65 74.244,-10.65 80.422,-4.472 80.422,7.905 82.169,9.652 87.63,9.652 88.646,10.668 88.646,16.637 U14.D30
  Bottom Layer w0.127: PB1.2@28.726,1.539 29.86,1.539 30.48,2.159 v1(34.279,2.159) ; v1(36.06,2.316) 36.093,2.349 36.55,2.349 36.614,2.413 48.132,2.413 48.259,2.286 v1(48.387,2.286)
PB2: PB2.2 R2.2 U14.D31 | length 138.3
  Top Layer w0.127: R2.2 22.074,-12.944 PB2.2@22.074,-10.048 ; v1(30.48,-23.114) 32.512,-25.146 39.497,-25.146 41.883,-22.76 v1(41.883,-22.706) ; v1(78.105,12.7) 78.867,12.7 U14.D31
  Bottom Layer w0.127: PB2.2@22.074,-10.048 30.48,-18.454 v1(30.48,-23.114) ; v1(41.883,-22.706) 41.91,-22.733 50.235,-22.733 54.095,-26.593 67.947,-26.593 69.464,-28.11 69.464,-34.482 69.504,-34.522 71.468,-36.195 75.946,-36.195 78.105,-34.036 v1(78.105,12.7)
RE_A: M2.A U14.D29 | length 26.3
  Top Layer w0.127: M2.A 67.222,14.344 69.692,11.874 86.148,11.874 86.211,11.811 87.376,11.811 88.212,12.647 88.212,14.909 87.373,15.748 U14.D29
RE_B: M2.B U14.D28 | length 23.2
  Top Layer w0.127: M2.B 69.596,14.646 69.596,12.954 70.294,12.255 77.856,12.255 77.902,12.21 78.308,12.21 78.354,12.255 86.042,12.255 U14.D28
RS: U9.03 U14.D16 | length 72.1
  Top Layer w0.127: U9.03 26.104,30.861 27.423,30.861 28.321,29.963 28.321,28.321 29.137,27.505 33.141,27.505 34.223,28.587 38.009,28.587 38.62,27.976 38.62,24.288 52.181,10.727 52.181,4.715 64.28,-7.384 67.201,-7.384 67.668,-7.851 67.69,-7.851 68.352,-8.513 68.352,-8.535 69.469,-9.652 U14.D16
SCL: U11.03 U12.03 U13.03 U14.D19 | length 123.9
  Top Layer w0.127: U11.03@15.423,-29.214 18.284,-29.214 24.384,-23.114 24.384,-17.685 33.401,-8.668 U13.03 30.607,-4.572 30.607,1.629 21.844,10.392 21.844,26.099 17.484,30.459 U12.03 ; v1(63.881,-19.939) 64.009,-19.939 64.263,-20.193 68.834,-20.193 U14.D19
  Bottom Layer w0.127: U13.03 36.576,-7.366 37.278,-8.068 56.582,-8.068 63.881,-15.367 v1(63.881,-19.939)
SDA: U11.04 U12.04 U13.04 U14.D18 | length 132
  Top Layer w0.127: U12.04 18.73,28.514 21.082,26.162 21.082,8.668 24.633,5.117 26.76,5.117 30.099,1.778 30.099,-7.747 31.732,-9.38 v1(31.732,-9.425) ; U11.04@17.272,-31.115 18.117,-31.115 25.821,-23.411 25.821,-17.486 U13.04 v1(35.053,-8.256) v1(35.053,-8.256) ; v1(63.119,-20.701) 68.961,-20.701 71.12,-18.542 72.517,-18.542 72.898,-18.161 72.898,-15.557 72.073,-14.732 U14.D18
  Bottom Layer w0.127: v1(31.732,-9.425) 32.213,-9.906 U13.04 ; v1(35.053,-8.256) 35.115,-8.318 35.544,-8.318 35.607,-8.382 55.626,-8.382 63.119,-15.875 v1(63.119,-20.701)
SHUT1: U11.06 U14.D40 | length 88.7
  Top Layer w0.127: U11.06 20.973,-35.687 25.527,-35.687 30.861,-30.353 35.893,-30.353 44.847,-21.399 74.231,-21.399 v1(74.93,-20.701)
  Bottom Layer w0.127: U14.D40 74.93,2.413 v1(74.93,-20.701)
SHUT2: U12.06 U14.D41 | length 93.3
  Top Layer w0.127: U12.06 9.998,24.622 8.744,23.368 6.805,23.368 6.731,23.442 6.731,27.051 15.367,35.687 26.035,35.687 32.881,28.841 38.114,28.841 38.874,28.081 38.874,24.393 60.093,3.175 71.628,3.175 U14.D41
SW1: R3.2 S1.1B U14.D32 | length 6.6
  Top Layer w0.127: S1.1B 85.852,26.289 86.995,25.146 U14.D32
  Bottom Layer w0.127: R3.2 85.852,29.303 S1.1B
SW2: R4.2 S1.2B U14.D37 | length 25.6
  Top Layer w0.127: U14.D37 72.898,13.208 74.041,14.351 74.041,23.622 76.2,25.781 82.804,25.781 83.312,26.289 S1.2B
  Bottom Layer w0.127: R4.2 83.312,29.303 S1.2B
SW3: R5.2 S1.3B U14.D36 | length 20.7
  Top Layer w0.127: U14.D36 73.025,15.748 73.66,16.383 73.66,23.749 76.073,26.162 80.264,26.162 80.772,26.67 S1.3B
  Bottom Layer w0.127: R5.2 80.772,29.303 S1.3B
SW4: R6.2 S1.4B U14.D35 | length 16
  Top Layer w0.127: U14.D35@71.824,18.705 71.792,18.674 71.755,18.637 U14.D35 72.669,18.288 73.279,18.898 73.279,23.876 75.946,26.543 77.978,26.543 78.232,26.797 S1.4B
  Bottom Layer w0.127: R6.2 78.232,29.303 S1.4B
SW5: R7.2 S1.5B U14.D34 | length 10.4
  Top Layer w0.127: U14.D34 72.707,21.78 72.707,23.812 75.692,26.797 S1.5B
  Bottom Layer w0.127: S1.5B R7.2
SW6: R8.2 S1.6B U14.D33 | length 6.8
  Top Layer w0.127: U14.D33 71.755,25.273 73.152,26.67 S1.6B
  Bottom Layer w0.127: S1.6B R8.2
pads on no net: PB1.1 PB1.3 PB2.1 PB2.3 U3.4 U4.4 U6.AISEN U6.BISEN U6.GND_in U6.nFAULT U6.nSLEEP U6.VMM U11.05 U12.05 U13.05 U13.06 U13.07 U13.08 U14.3V3 U14.3V3@2 U14.D0 U14.D1 U14.D7 U14.D8 U14.D9 U14.D11 U14.D12 U14.D13 U14.D20 U14.D21 U14.D22 U14.D23 U14.D24 U14.D38 U14.D39

## Silkscreen, mask and mechanical layers (free items; w line width, h text height)
Mechanical 1:
  circle w0.006: c51.054,0.127 r0.003
  circle w0.013: c12.054,-16.373 r1.5
  circle w0.013: c12.054,16.627 r1.5
  circle w0.013: c42.054,-28.123 r1.225
  circle w0.013: c60.054,-28.123 r1.225
  circle w0.013: c60.054,28.377 r1.225
  circle w0.013: c42.054,28.377 r1.225
  lines w0.013: 0.054,-22.323 ccw(c25.165,-18.472) 16.554,-42.373 30.554,-42.373 ccw(c30.554,-38.873) 34.054,-38.873 34.054,-35.873 cw(c37.554,-35.873) 37.554,-32.373 64.554,-32.373 cw(c64.554,-35.873) 68.054,-35.873 68.054,-36.373 ccw(c71.554,-36.373) 71.554,-39.873 84.054,-39.873 ccw(c84.054,-33.873) 90.054,-33.873 90.054,34.127 ccw(c84.054,34.127) 84.054,40.127 71.554,40.127 ccw(c71.554,36.627) 68.054,36.627 68.054,36.127 cw(c64.554,36.127) 64.554,32.627 37.554,32.627 cw(c37.554,36.127) 34.054,36.127 34.054,39.127 ccw(c30.554,39.127) 30.554,42.627 16.554,42.627 ccw(c25.165,18.726) 0.054,22.577 0.054,-22.323 ; 5.054,-9.33 ccw(c6.597,-9.33) 6.597,-10.873 19.011,-10.873 ccw(c19.011,-9.33) 20.554,-9.33 20.554,9.584 ccw(c19.011,9.584) 19.011,11.127 6.597,11.127 ccw(c6.597,9.584) 5.054,9.584 5.054,-9.33

## Text inside footprints (layer, text, board x,y; h text height)
U2: Bottom Overlay "GND" at 19.816,-14.986 h0.5 r270; Bottom Overlay "VCC-OUT" at 19.816,-26.797 h0.5 r270; Bottom Overlay "GND" at 35.683,-13.716 h0.5 r90; Bottom Overlay "VCC-IN" at 35.683,-23.749 h0.5 r90
U5: Bottom Overlay "GND" at 35.175,15.113 h0.5 r90; Bottom Overlay "VCC-OUT" at 35.175,26.924 h0.5 r90; Bottom Overlay "GND" at 19.308,13.843 h0.5 r270; Bottom Overlay "VCC-IN" at 19.308,23.876 h0.5 r270
U6: Top Overlay "IN" at 21.717,24.587 h0.51; Top Overlay "OUT" at 33.909,24.511 h0.51
U14: Top Overlay ">TEENSY" at 76.581,-29.337 h0.8